# Altium PCB ARRAY-5050.PcbDoc
Units mm, origin at the board's own origin, x right, y up, seen from the top; angles counter-clockwise.
Board outline 126 x 124.09 mm, 2 copper layers (Top Layer, Bottom Layer), stack 1.181 mm thick; 19 components, 20 nets, 76 pads, 18 vias.
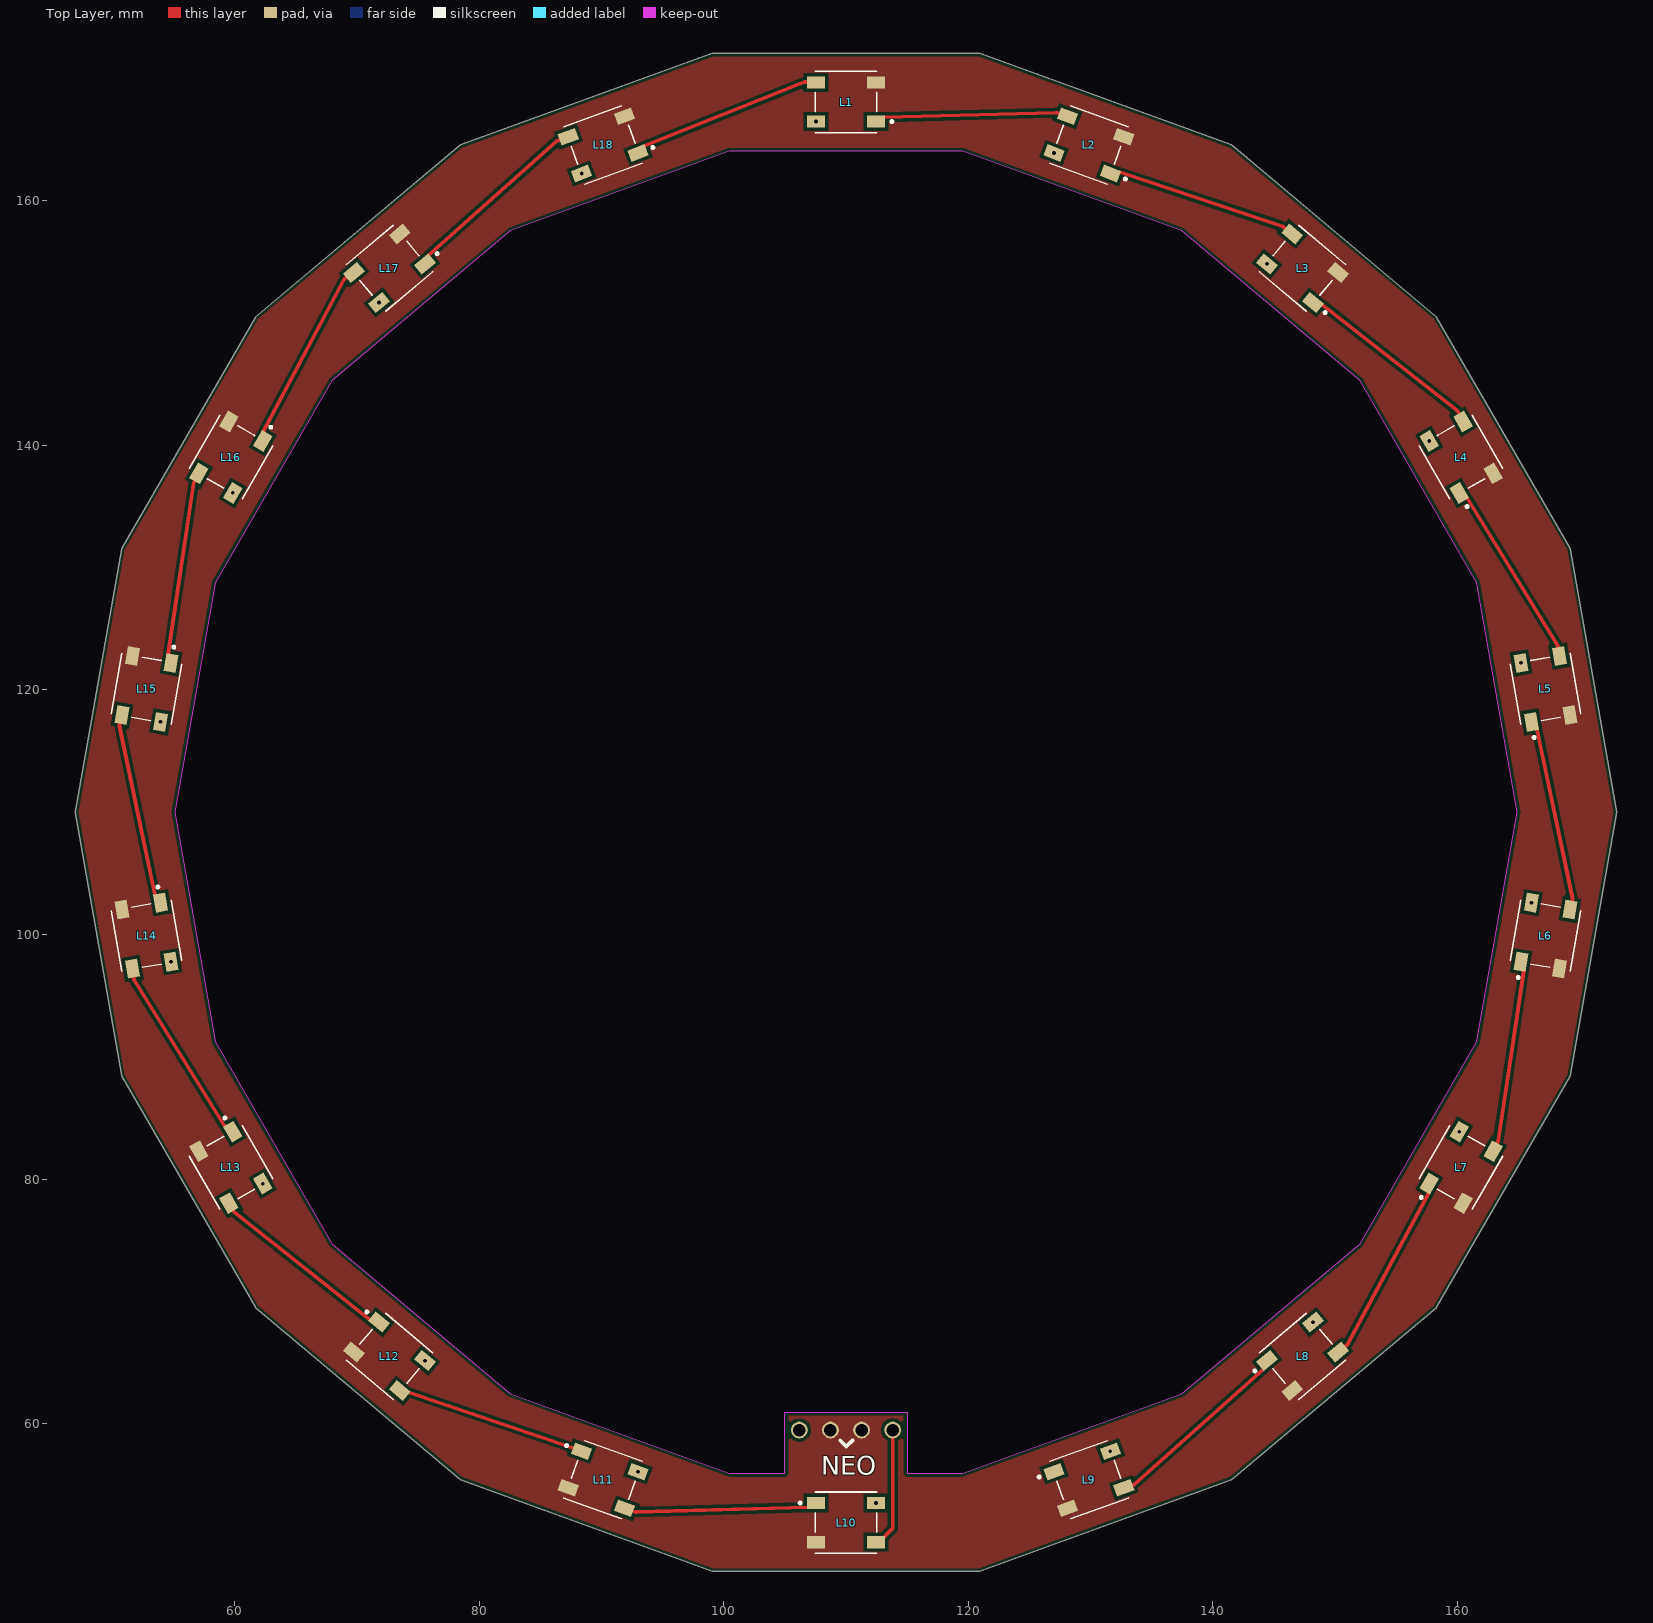
[diagram p0: Top Layer view]
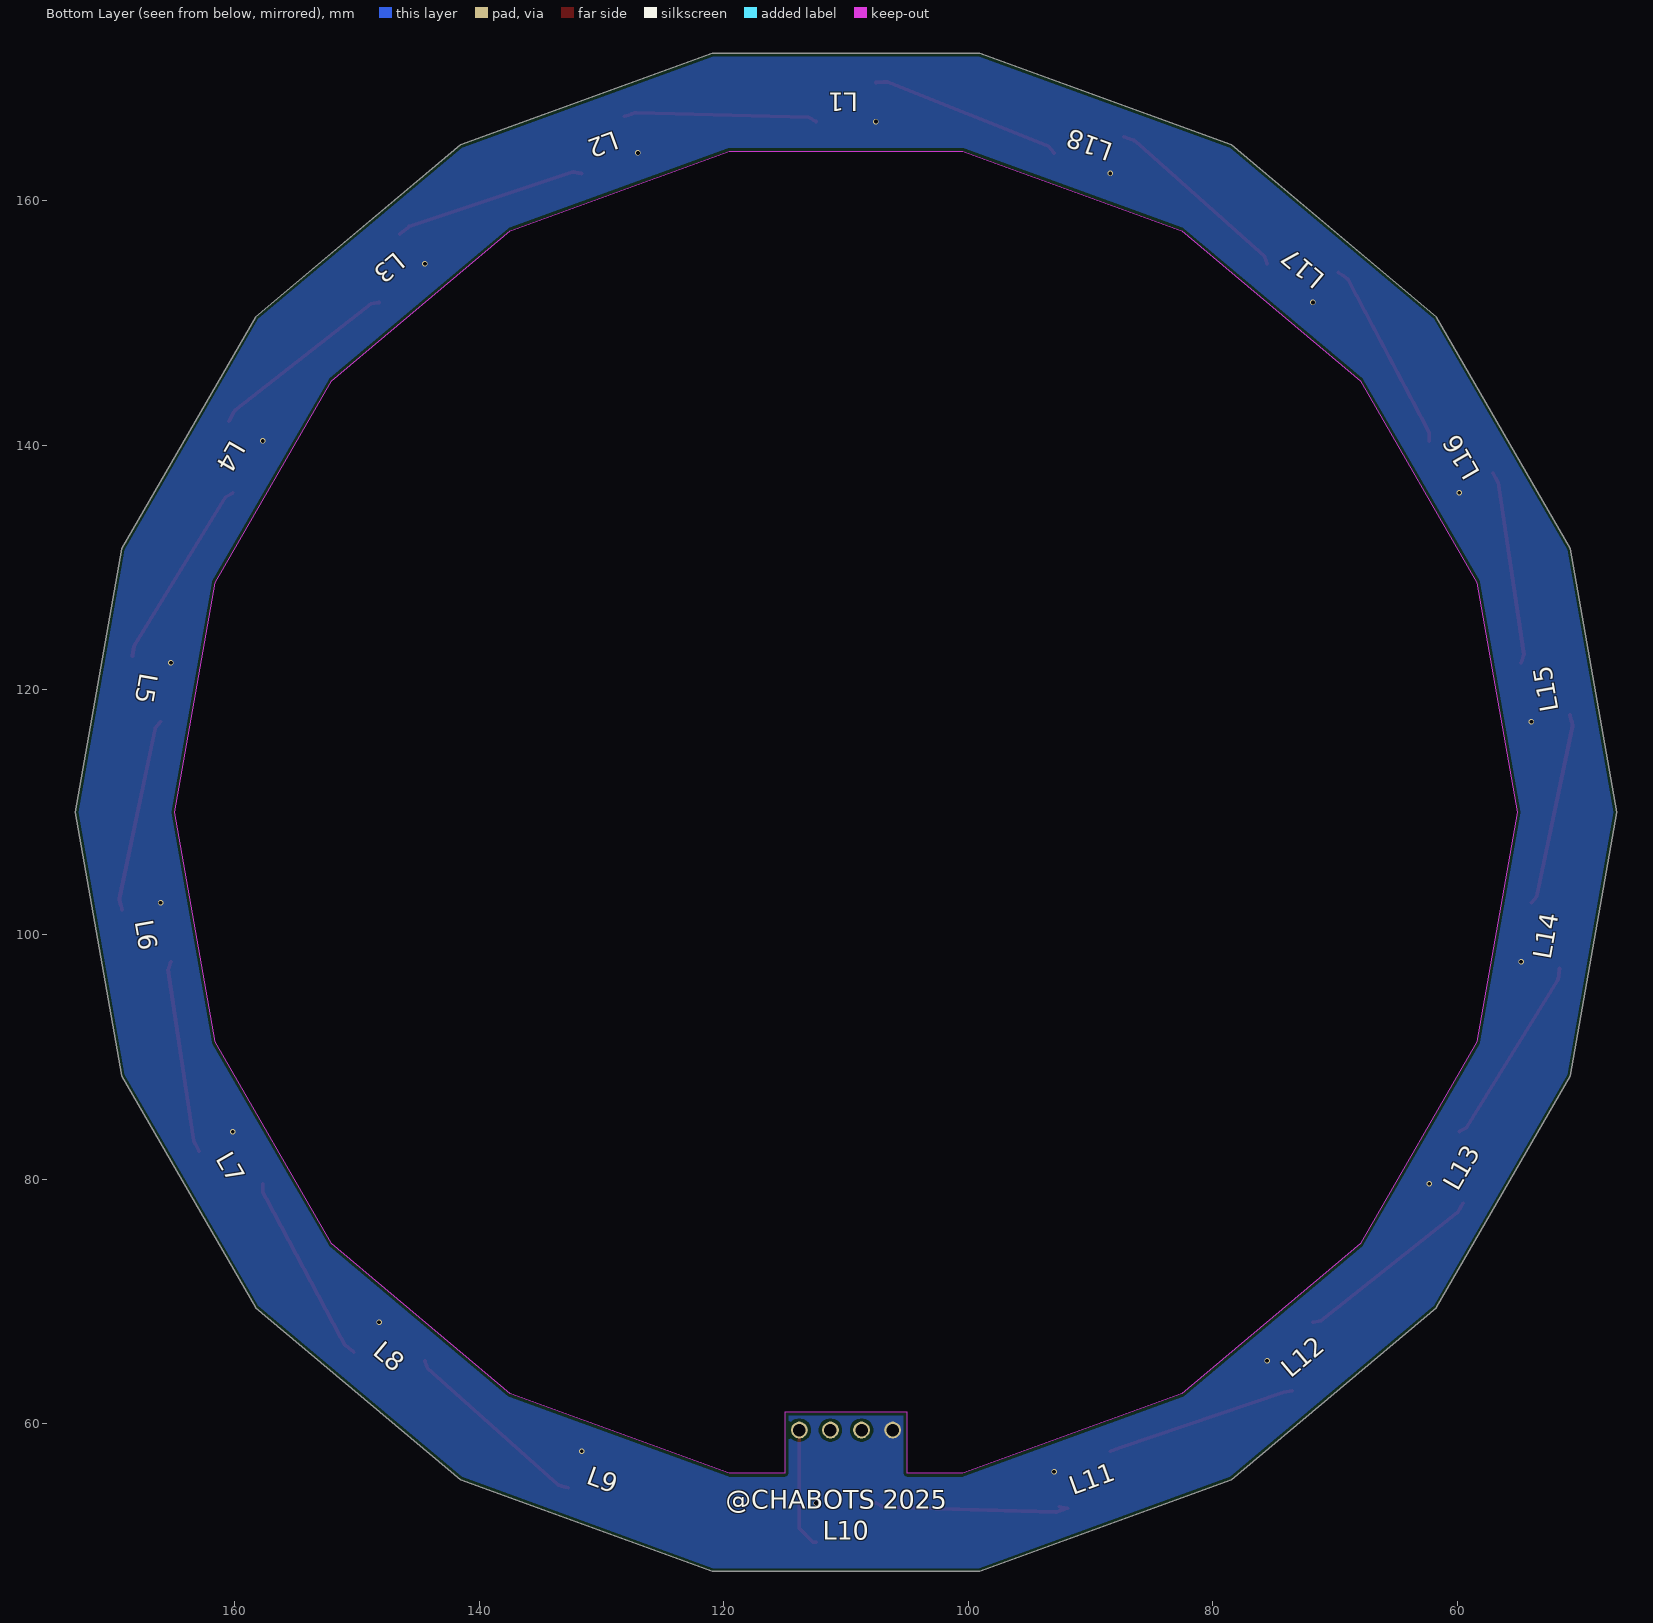
[diagram p1: Bottom Layer view, seen from below]
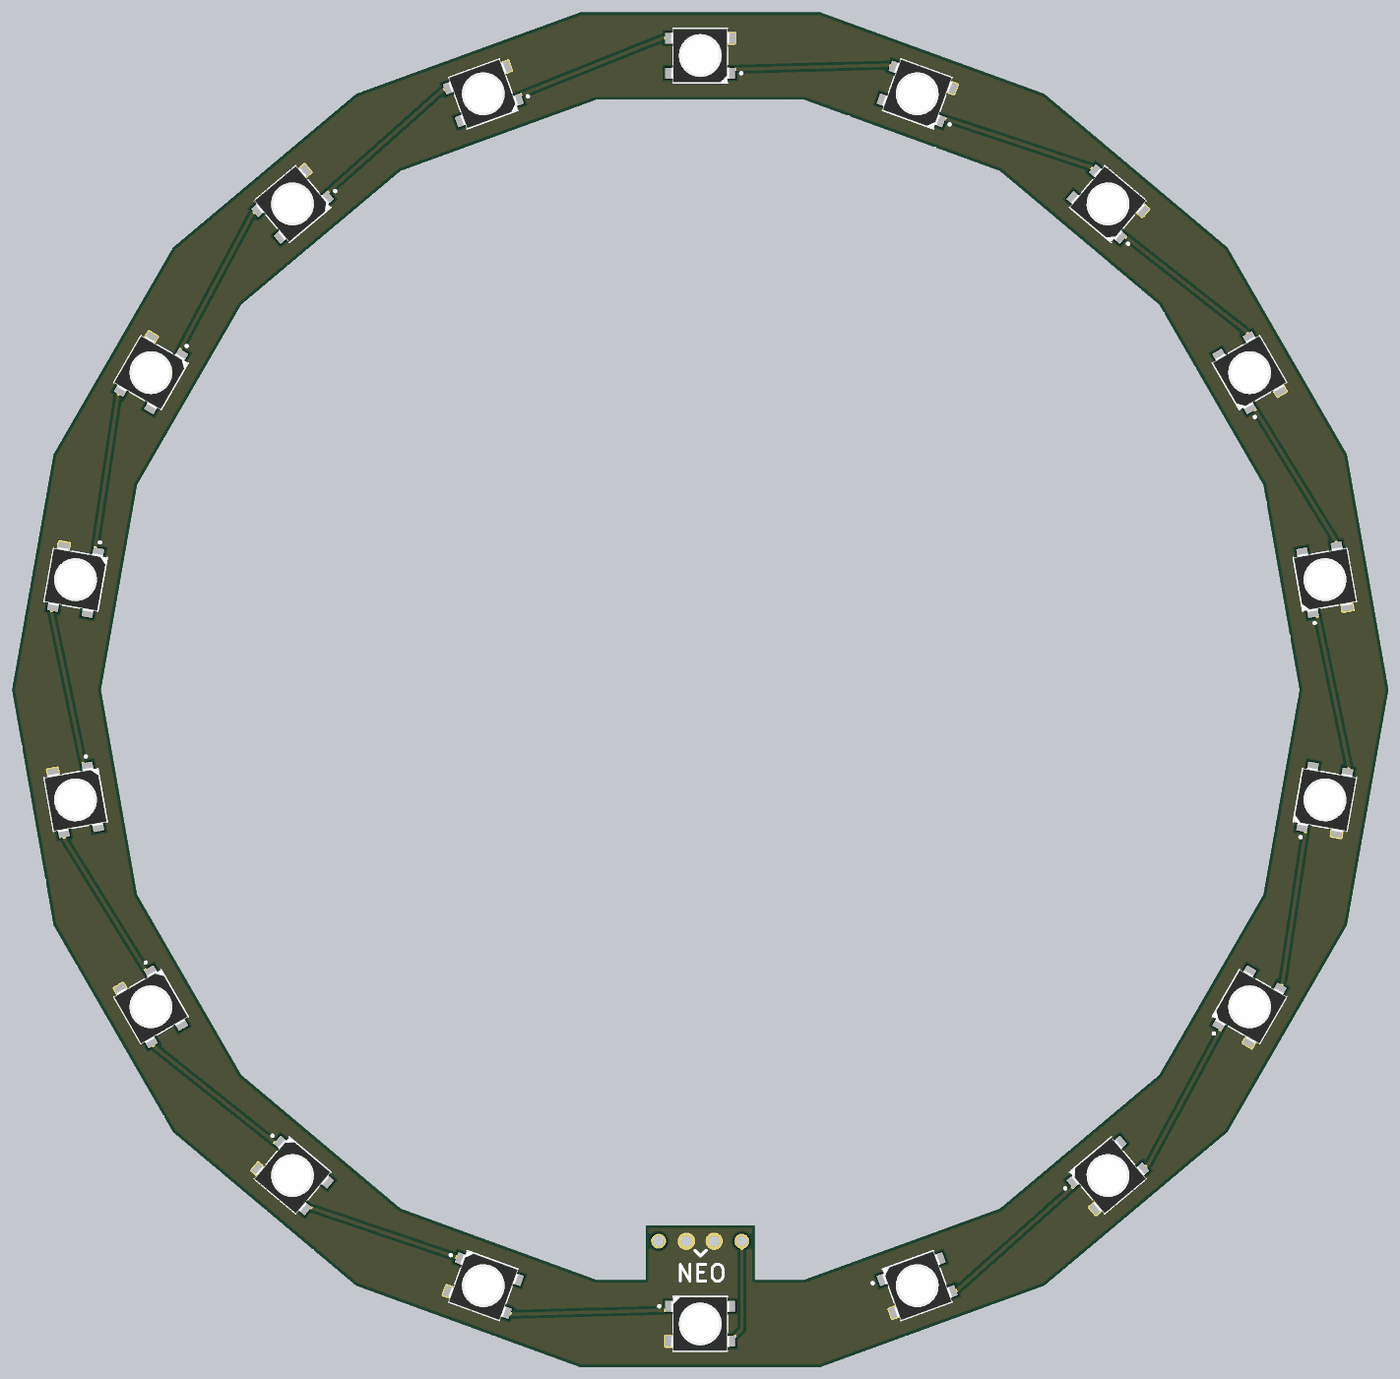
[diagram p2: 3D render of the assembled board from above, using the file's embedded part models]

## Layer stack, top to bottom
Top Solder: solder mask 0.0102, Solder Resist, Dk 3.5
Top Layer: signal copper 0.0356
Dielectric 1: dielectric 1.11, FR-4, Dk 4.8
Bottom Layer: signal copper 0.0356
Bottom Solder: solder mask 0.0102, Solder Resist, Dk 3.5

## Board outline
61.739,69.504 50.799,88.453 47,110 50.799,131.547 61.739,150.496 78.5,164.56 99.06,172.043 120.94,172.043 141.5,164.56 158.261,150.496 169.201,131.547 173,110 169.201,88.453 158.261,69.504 141.5,55.44 120.94,47.957 99.06,47.957 78.5,55.44
cut-out: 67.962,74.726 82.562,62.475 100.471,55.957 105,55.957 105,60.957 115,60.957 115,55.957 119.529,55.957 137.438,62.475 152.038,74.726 161.567,91.231 164.877,110 161.567,128.769 152.038,145.274 137.438,157.525 119.529,164.043 100.471,164.043 82.562,157.525 67.962,145.274 58.433,128.769 55.123,110 58.433,91.231

## Design rules (kind name [scope] priority, off if disabled: settings)
BoardOutlineClearance [All] p1: gap=0.254 ignorepadtopadclearanceinfootprint=FALSE except(0: Arc-SplitContinuation Track-SplitContinuation SMDPad-SplitContinuation THPad-SplitContinuation Via-SplitContinuation Fill-SplitContinuation Poly-SplitContinuation Region-SplitContinuation Text-SplitContinuation)
Clearance [All] p1: gap=0.254 ignorepadtopadclearanceinfootprint=FALSE
PolygonConnect [All] p1: connectstyle=Direct reliefconductorwidth=0.254 reliefentries=4 polygonreliefangle="90 Angle" airgapwidth=0.254
RoutingVias [All] p1: holewidth=0.711 width=1.27 viastyle="Through Hole" minholewidth=0.711 minwidth=1.27 maxholewidth=0.711 maxwidth=1.27
SolderMaskExpansion [All] p1: expansion=0.102 istentingtop=FALSE
SupplyNets "Schematic Supply Nets_1" [InNet('GND')] p1: voltage=0.000
SupplyNets "Schematic Supply Nets" [InNet('+3V')] p2: voltage=0.000
ViasUnderSMD [All] p1: allowed=FALSE
Width [All] p1: maxlimit=10 minlimit=0.254 preferedwidth=0.3
30 further rules are at their usual default settings.

## Components (designator, comment, footprint, x,y, rotation, side; value= is the part's Value field where it differs from the comment)
L1 "WS2812-2020" NEOPIXEL-5050 110,168.064 r180 top
L2 "WS2812-2020" NEOPIXEL-5050 129.859,164.562 r160 top
L3 "WS2812-2020" NEOPIXEL-5050 147.323,154.48 r140 top
L4 "WS2812-2020" NEOPIXEL-5050 160.285,139.032 r120 top
L5 "WS2812-2020" NEOPIXEL-5050 167.182,120.083 r100 top
L6 "WS2812-2020" NEOPIXEL-5050 167.182,99.917 r80 top
L7 "WS2812-2020" NEOPIXEL-5050 160.285,80.968 r60 top
L8 "WS2812-2020" NEOPIXEL-5050 147.323,65.52 r40 top
L9 "WS2812-2020" NEOPIXEL-5050 129.859,55.438 r20 top
L10 "WS2812-2020" NEOPIXEL-5050 110,51.936 r0 top
L11 "WS2812-2020" NEOPIXEL-5050 90.141,55.438 r340 top
L12 "WS2812-2020" NEOPIXEL-5050 72.677,65.52 r320 top
L13 "WS2812-2020" NEOPIXEL-5050 59.715,80.968 r300 top
L14 "WS2812-2020" NEOPIXEL-5050 52.818,99.917 r280 top
L15 "WS2812-2020" NEOPIXEL-5050 52.818,120.083 r260 top
L16 "WS2812-2020" NEOPIXEL-5050 59.715,139.032 r240 top
L17 "WS2812-2020" NEOPIXEL-5050 72.677,154.48 r220 top
L18 "WS2812-2020" NEOPIXEL-5050 90.141,164.562 r200 top
NEO "NEOPIXEL-ARRAY" NEOPIXEL-ARRAY 110.03,59.5 r0 top

## Footprints (in the part's own frame and the unit in brackets; to place one, negate y for a bottom-side part, rotate by r counter-clockwise, add the part's x,y. Pads: shape width x height; smd on the part's side, far side on the other; paste and mask are expansions set on the pad)
NEOPIXEL-5050 [mm]
  rect 1.5x1 smd: 1(-2.45,1.6) 2(-2.45,-1.6) 3(2.45,-1.6) 4(2.45,1.6)
  silkscreen extent -3.85,-2.5 2.5,2.5, body extent -2.7,-2.51 2.7,2.49, height 1.5
NEOPIXEL-ARRAY [mm]
  round 1.37 hole 1.02: DIN(3.78,0) GND(-1.3,0) GND(1.24,0) VCC(-3.84,0)
  silkscreen extent -0.5,-1.35 0.5,-0.85

## Part data
L1 L2 L3 L4 L5 L6 L7 L8 L9 L10 L11 L12 L13 L14 L15 L16 L17 L18: library part NEOPIXEL-5050

## Via types
v1: diameter 0.45, hole 0.3, Top Layer to Bottom Layer, tented both sides, 18 vias

## Nets (pads, with @x,y where several pads share a name; then routed paths per layer and width w, separated by ;. In a path a pad name is that pad's centre, name@x,y a point inside that pad or via, vN(x,y) a via of type N, cw(c..) or ccw(c..) an arc to the next point about the centre after c; other vN are vias at no path point)
+3V: L1.4 L2.4 L3.4 L4.4 L5.4 L6.4 L7.4 L8.4 L9.4 L10.4 L11.4 L12.4 L13.4 L14.4 L15.4 L16.4 L17.4 L18.4 NEO.VCC | length 0.3
  Top Layer w0.3: NEO.VCC NEO.VCC@106.236,59.5 ; L10.4@112.2,53.536 v1(112.45,53.536)
  other v1: 92.99,56.103 131.614,57.779 75.582,65.171 148.171,68.321 62.326,79.646 160.124,83.89 54.819,97.782 166.032,102.608 53.968,117.392 165.181,122.218 59.876,136.11 157.674,140.354 71.829,151.679 144.418,154.829 88.386,162.221 127.01,163.897 107.55,166.464
GND: L1.2 L2.2 L3.2 L4.2 L5.2 L6.2 L7.2 L8.2 L9.2 L10.2 L11.2 L12.2 L13.2 L14.2 L15.2 L16.2 L17.2 L18.2 NEO.GND
NEO-DIN: L10.3 NEO.DIN | length 9.9
  Top Layer w0.3: L10.3 112.7,50.336 113.81,51.446 NEO.DIN
NetL1_1: L1.1 L2.3 | length 15.8
  Top Layer w0.3: L1.1 113.05,166.814 127.148,167.199 ; 127.149,167.199 cw(c127.156,166.899) 127.259,167.181 127.53,167.082 L2.3
NetL1_3: L1.3 L18.1 | length 15.8
  Top Layer w0.3: L18.1 93.435,164.431 106.541,169.676 cw(c106.652,169.398) 106.652,169.698 106.95,169.698 L1.3
NetL2_1: L2.1 L3.3 | length 15.8
  Top Layer w0.3: L2.1 132.298,162.345 145.649,157.917 ; 145.65,157.917 cw(c145.555,157.632) 145.747,157.862 146.001,157.649 L3.3
NetL3_1: L3.1 L4.3 | length 15.8
  Top Layer w0.3: L3.1 148.856,151.562 159.95,142.84 cw(c159.764,142.604) 160.024,142.754 160.176,142.491 L4.3
NetL4_1: L4.1 L5.3 | length 15.8
  Top Layer w0.3: L4.1 160.727,135.766 168.169,123.651 ; 168.169,123.65 cw(c167.913,123.494) 168.209,123.546 168.24,123.366 L5.3
NetL5_1: L5.1 L6.3 | length 15.8
  Top Layer w0.3: L5.1 166.48,116.862 169.386,102.968 cw(c169.092,102.907) 169.388,102.855 169.348,102.632 L6.3
NetL6_1: L6.1 L7.3 | length 15.8
  Top Layer w0.3: L7.3 163.151,82.835 163.27,83.042 ccw(c163.01,83.192) 163.307,83.146 ; 163.307,83.147 165.421,97.131 L6.1
NetL7_1: L7.1 L8.3 | length 15.8
  Top Layer w0.3: L8.3 150.696,66.246 150.957,66.465 ccw(c150.764,66.695) 151.028,66.553 157.677,78.952 L7.1
NetL8_1: L8.1 L9.3 | length 15.8
  Top Layer w0.3: L9.3 133.29,54.928 133.454,54.987 ccw(c133.351,55.269) 133.551,55.045 144.183,64.517 L8.1
NetL10_1: L10.1 L11.3 | length 17.2
  Top Layer w0.3: L11.3@92.579,53.22 L11.3 92.47,52.918 92.741,52.819 ccw(c92.844,53.101) 92.852,52.801 106.95,53.186 L10.1 L10.1@106.95,53.22
NetL11_1: L11.1 L12.3 | length 15.7
  Top Layer w0.3: L12.3 74.21,62.602 87.497,58.101 ; 87.498,58.101 cw(c87.401,57.817) 87.503,58.099 87.822,57.983 L11.1
NetL12_1: L12.1 L13.3 | length 15.8
  Top Layer w0.3: L13.3 59.865,77.533 59.97,77.351 ccw(c60.23,77.501) 60.042,77.266 ; 60.043,77.266 71.144,68.438 L12.1
NetL13_1: L13.1 L14.3 | length 15.8
  Top Layer w0.3: L14.3 51.744,96.631 51.793,96.352 ccw(c52.088,96.405) 51.832,96.248 51.833,96.247 59.273,84.234 L13.1
NetL14_1: L14.1 L15.3 | length 15.8
  Top Layer w0.3: 50.614,117.032 53.52,103.138 L14.1 ; 50.614,117.033 cw(c50.908,117.093) 50.612,117.145 50.652,117.368 L15.3
NetL15_1: L15.1 L16.3 | length 15.8
  Top Layer w0.3: L15.1 54.579,122.869 56.692,136.945 cw(c56.988,136.9) 56.729,137.05 L16.3
NetL16_1: L16.1 L17.3 | length 15.8
  Top Layer w0.3: L16.1 62.323,141.048 68.966,153.535 ; 68.966,153.536 cw(c69.23,153.394) 69.038,153.624 69.258,153.809 L17.3
NetL17_1: L17.1 L18.3 | length 15.8
  Top Layer w0.3: L17.1 75.817,155.483 86.358,164.862 cw(c86.557,164.638) 86.454,164.92 86.729,165.02 L18.3
pads on no net: L9.1

## Polygon pours and split planes (outlines as drawn)
GND on Top Layer "GND_L01_P000" (solid, pour order 0): 99.1,47.9 120.9,47.9 141.5,55.4 158.3,69.5 169.3,88.5 173,110 169.2,131.5 158.3,150.5 141.5,164.6 120.9,172.1 99.1,172.1 78.5,164.6 61.7,150.5 50.8,131.6 47,110 50.8,88.4 61.8,69.4 78.5,55.4
+3V on Bottom Layer "+3V_L02_P002" (solid, pour order 2): 99.1,47.9 120.9,47.9 141.5,55.4 158.3,69.5 169.3,88.5 173,110 169.2,131.5 158.3,150.5 141.5,164.6 120.9,172.1 99.1,172.1 78.5,164.6 61.7,150.5 50.8,131.6 47,110 50.8,88.4 61.8,69.4 78.5,55.4

## Silkscreen, mask and mechanical layers (free items; w line width, h text height)
Bottom Overlay:
  text "@CHABOTS 2025" at 119.846,53.054 h1.52